# Altium PCB NerveSensePCBv0.2.PcbDoc
Units mil, origin at the board's own origin, x right, y up, seen from the top; angles counter-clockwise.
Board outline 1015 x 790 mil, 2 copper layers (Top Layer, Bottom Layer); 8 components, 9 nets, 28 pads, 6 vias.
Unrouted connection lines stored in the file: 1.
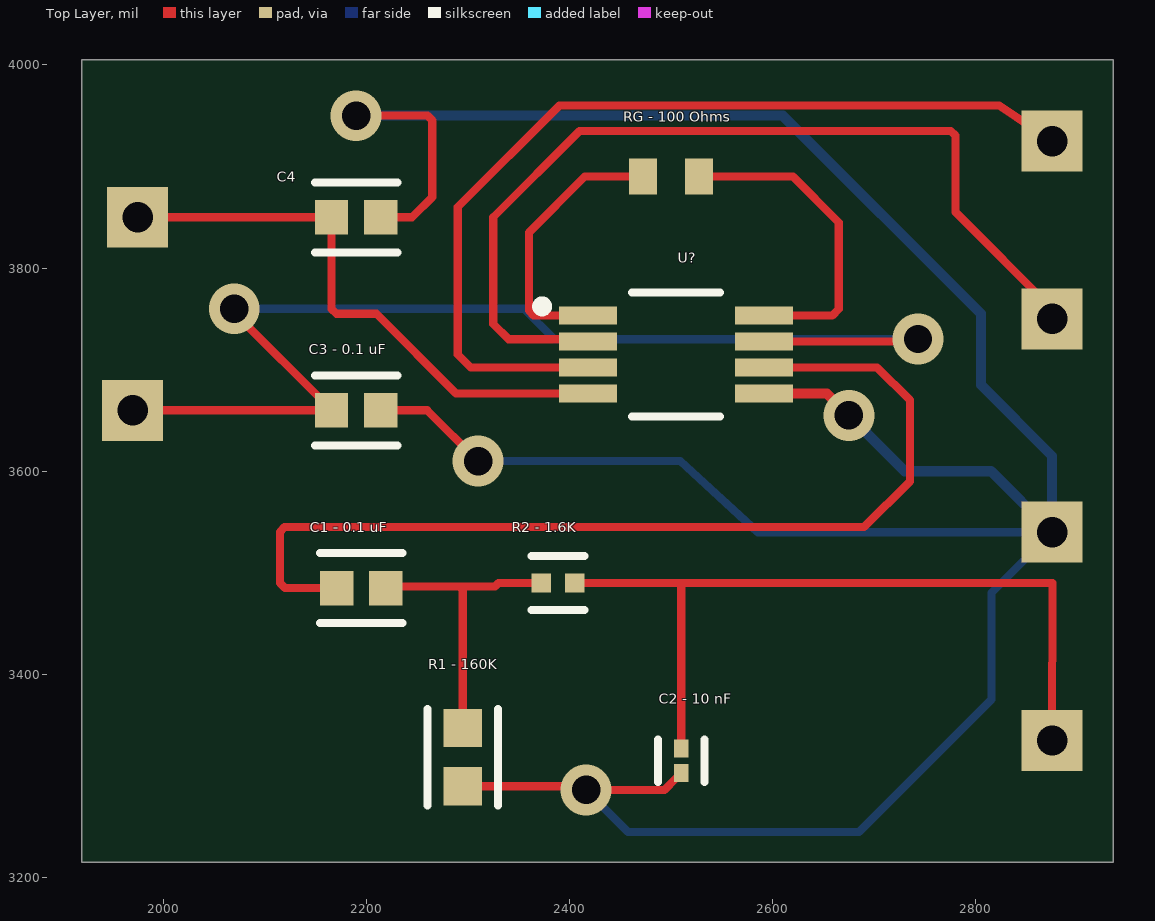
[diagram p0: Top Layer view]
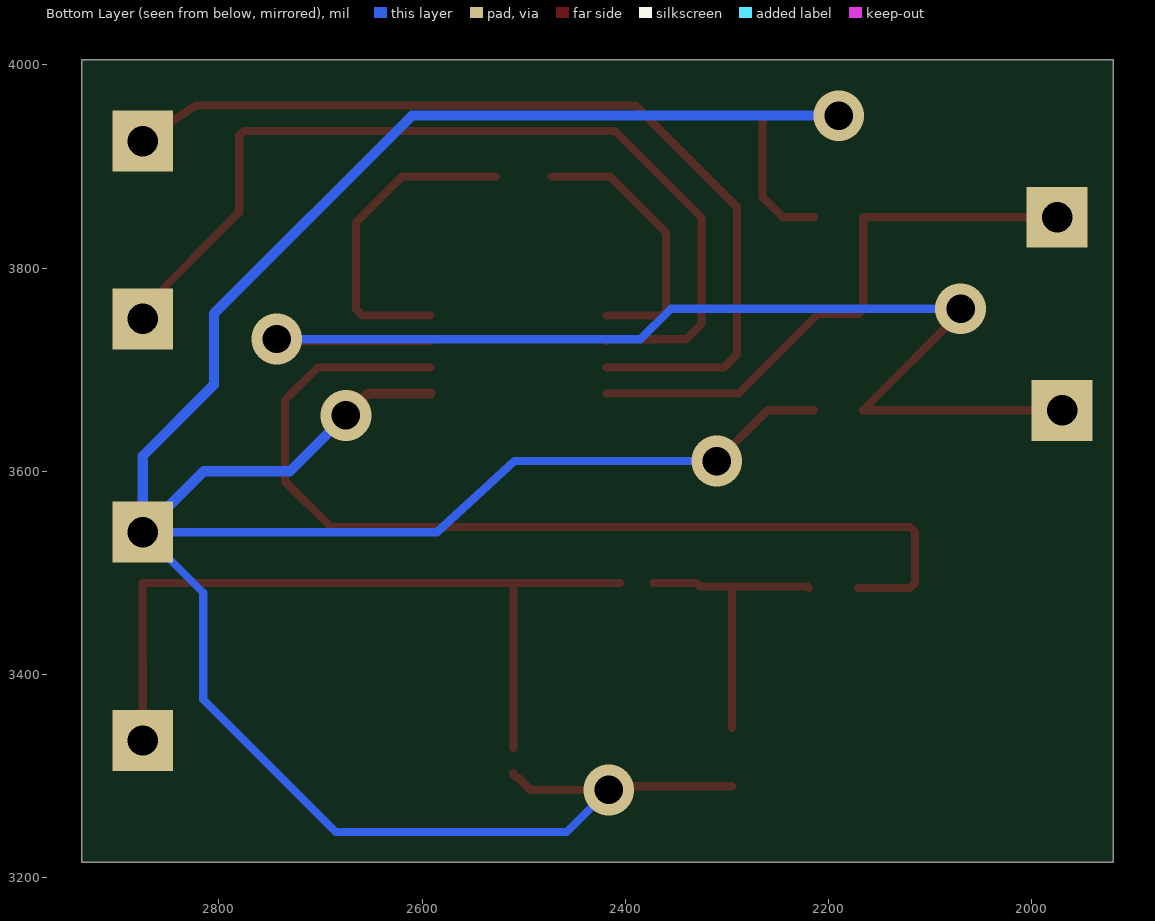
[diagram p1: Bottom Layer view, seen from below]
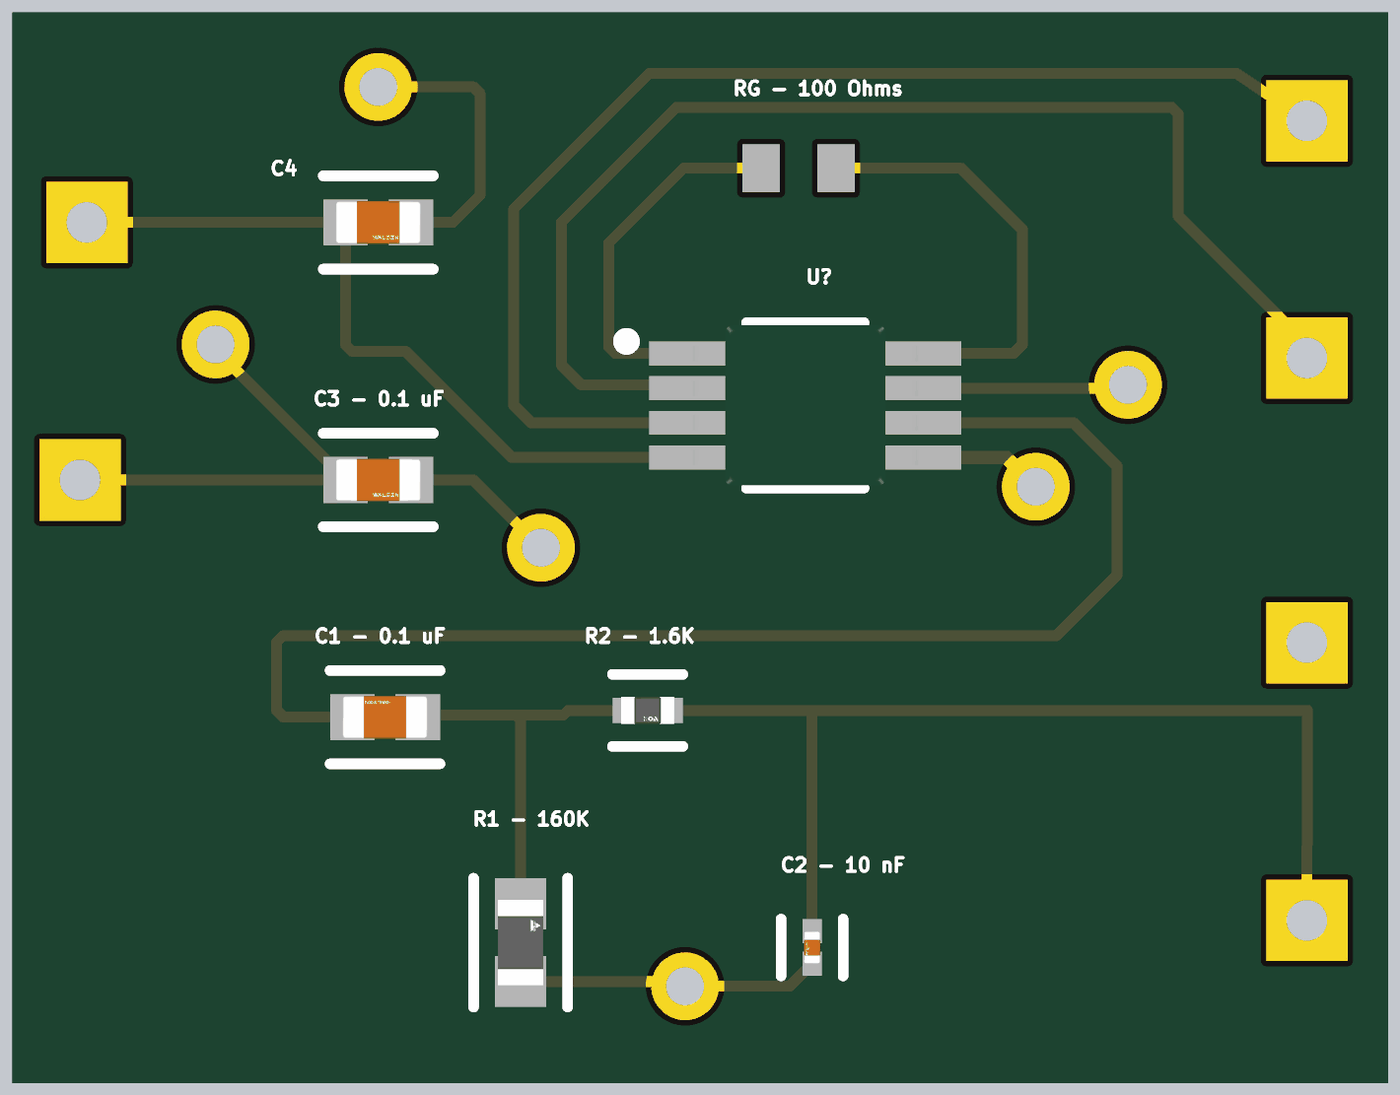
[diagram p2: 3D render of the assembled board from above, using the file's embedded part models]

## Layer stack, top to bottom
Top Solder: solder mask 0.4, Solder Resist, Dk 3.5
Top Layer: signal copper 1.4
Dielectric 1: dielectric 12.6, FR-4, Dk 4.8
Bottom Layer: signal copper 1.4
Bottom Solder: solder mask 0.4, Solder Resist, Dk 3.5

## Board outline
1920,3215 2935,3215 2935,4005 1920,4005

## Design rules (kind name [scope] priority, off if disabled: settings)
Clearance [All] p1: gap=10 ignorepadtopadclearanceinfootprint=FALSE
PolygonConnect [All] p1: connectstyle=Relief reliefconductorwidth=10 reliefentries=4 polygonreliefangle="90 Angle" airgapwidth=10
RoutingVias [All] p1: holewidth=28 width=50 viastyle="Through Hole" minholewidth=28 minwidth=50 maxholewidth=28 maxwidth=50
SolderMaskExpansion [All] p1: expansion=4 istentingtop=FALSE
SupplyNets "Schematic Supply Nets_2" [InNet('GND')] p1: voltage=0.000
SupplyNets "Schematic Supply Nets_1" [InNet('VSS')] p2: voltage=0.000
SupplyNets "Schematic Supply Nets" [InNet('VCC1')] p3: voltage=0.000
Width [All] p1: maxlimit=10 minlimit=8 preferedwidth=8 minimp=50.000000 maximp=50.000000 favimp=50.000000
30 further rules are at their usual default settings.

## Classes and differential pairs
component class NerveSenseCircuit: "C1 - 0.1 uF" "C2 - 10 nF" "C3 - 0.1 uF" C4 "R1 - 160K" "R2 - 1.6K" "RG - 100 Ohms"

## Components (designator, comment, footprint, x,y, rotation, side; value= is the part's Value field where it differs from the comment)
"C1 - 0.1 uF" "0603B104K500CT" FP-0603B104K500CT-IPC_C 2195,3485 r180 top
"C2 - 10 nF" "GRM033R60J103KA01J" FP-GRM033-0_03-IPC_B 2510,3315 r270 top
"C3 - 0.1 uF" "0603B104K500CT" FP-0603B104K500CT-IPC_C 2190,3660 r0 top
C4 "0603B104K500CT" FP-0603B104K500CT-IPC_C 2190,3850 r0 top
"R1 - 160K" "CRCW0603160KJNEAHP" FP-CRCW0603-HPe3-IPC_B 2295,3318.62 r90 top
"R2 - 1.6K" "RN73R1ETTP1601F25" FP-RN73R1E-IPC_C 2388.7,3490 r0 top
"RG - 100 Ohms" "RC0603JR-10100RL" RESC1608X55X25NL10T15 2500,3890 r180 top
U? "INA333AIDGKT" FP-DGK0008A-MFG 2505,3715 r0 top

## Footprints (in the part's own frame and the unit in brackets; to place one, negate y for a bottom-side part, rotate by r counter-clockwise, add the part's x,y. Pads: shape width x height; smd on the part's side, far side on the other; paste and mask are expansions set on the pad)
FP-0603B104K500CT-IPC_C [mil]
  rect 32.77x33.85 smd paste+0 mask+0: 1(-24.16,0) 2(24.16,0)
  silkscreen extent -41,-34 41,34, body extent -44,-23 44,23, height 10
FP-CRCW0603-HPe3-IPC_B [mil]
  rect 37.72x37.88 smd paste+0 mask+0: 1(-28.62,0) 2(28.62,0)
  silkscreen extent -47,-35 47,35, body extent -57,-29 57,29, height 10
FP-DGK0008A-MFG [mm]
  rect 1.45x0.45 smd paste+0 mask+0: 1(-2.2,0.975) 2(-2.2,0.325) 3(-2.2,-0.325) 4(-2.2,-0.975) 5(2.2,-0.975) 6(2.2,-0.325) 7(2.2,0.325) 8(2.2,0.975)
  silkscreen extent -3.47,-1.55 1.1,1.55, body extent -3.03,-1.8 3.03,1.8, height 0.25
FP-GRM033-0_03-IPC_B [mil]
  rect 17.88x14.28 smd paste+0 mask+0: 1(-11.98,0) 2(11.98,0)
  silkscreen extent -21,-23 21,23, body extent -27,-13 27,13, height 10
FP-RN73R1E-IPC_C [mil]
  rect 19.2x18.6 smd paste+0 mask+0: 1(-16.3,0) 2(16.3,0)
  silkscreen extent -26,-27 26,27, body extent -30,-15 30,15, height 10
RESC1608X55X25NL10T15 [mm] "Chip Resistor, 2-Leads, Body 1.60x0.80mm, IPC Medium Density"
  rect 0.7x0.9 smd: 1(-0.7,0) 2(0.7,0)
  body extent -0.85,-0.45 0.85,0.45, height 0.55

## Part data
"C1 - 0.1 uF" "C3 - 0.1 uF" C4: library part CMP-45632-000007-1, "CAP CER 0.1UF 50V X7R 0603", Capacitance=100nF, Case Code (Imperial)=0603, Case Code (Metric)=1608, Dielectric=X7R, Max Operating Temperature=125°C, Min Operating Temperature=-55°C, Tolerance=10%, Voltage Rating=50V, Case/Package=0603, Depth=0.8mm, Lead Free="Lead Free", Length=1.6mm, Packaging="Tape and Reel", Radiation Hardening=No, RoHS Compliant=Yes, Series=-, Voltage Rating (DC)=50V
"C2 - 10 nF": library part CMP-06035-052966-1, "Chip Multilayer Ceramic Capacitors for General Purpose, 0201, 10000pF, X5R, 15%, 10%, 6.3V"
"R1 - 160K": library part CMP-02407-008081-1, "RES Thick Film, 160kΩ, 5%, 0.33W, 200ppm/°C, 0603", Case/Package=0603, Max Operating Temperature=155°C, Max Power Dissipation=250mW, Min Operating Temperature=-55°C, Package Quantity=5000, Resistance=160kR, Temperature Coefficient=200ppm/°C, Tolerance=5%, Composition="Thick Film", Features="Automotive AEC-Q200", Height=0.022inch, Lead Free="Lead Free", Length=0.063inch, Number of Terminations=2, Packaging="Tape and Reel", Width=0.033inch
"R2 - 1.6K": library part CMP-04015-017185-1, "1.6kΩ ±1% 0.063W, 1/16W Chip Resistor 0402 (1005 Metric) Moisture Resistant Thin Film"
"RG - 100 Ohms": library part CMP-2000-04302-1, Manufacturer=Yageo, Part Number=RC0603JR-10100RL
U?: library part CMP-0944-00090-3, "IC INST AMP 1 CIRCUIT 8VSSOP", Ambient Temperature Range High=+125°C, Ambient Temperature Range Low=-40°C, Input Bias Current=0.00007uA, Input Offset Voltage=0.010-0.025mV, Manufacturer="Texas Instruments", Max Dual Supply Voltage=2.75V, Max Junction Temp=+150°C, Max Supply Voltage=5.5V, Min Dual Supply Voltage=0.9V, Min Supply Voltage=1.8V, Nominal Supply Current=50uA, Package=DGK0008A, Temperature="-40°C to +125°C", Voltage Gain=0.001-1V/mV, Automotive=No, Bandwidth=150kHz, Category=IC, Ciiva Ids=1154636, ComponentLink2Description=Datasheet, ComponentLink2URL=http://www.ti.com/lit/ds/symlink/ina333.pdf, Device Class L1="Integrated Circuits (ICs)", Device Class L2="Linear ICs", Device Class L3=Instrumentation, Digikey Description="IC INST AMP 1 CIRCUIT 8VSSOP", Height=1.1mm, Import Ts=1521844208, Lead Free=Yes, Manufacturer Part Number=INA333AIDGKT, Mouser Description="Instrumentation Amplifiers Lo Pwr Prec Inst Amp", Number Of Channels=1, Octopart=https://octopart.com/ina333aidgkt-texas+instruments-8315938, Release Date=1464176905, RoHS=TRUE, Standoff Height=0.05mm, Temperature Range High=+125°C, Temperature Range Low=-40°C

## Free pads (board coordinates)
  rect 60x60 hole 30: "Ground Electrode"(2875,3540) "Negative Electrode"(2875,3750) "Sensor Electrode"(2875,3925) Vout(2875,3335) ""(1970,3660) ""(1975,3850)

## Via types
v1: diameter 50, hole 28, Top Layer to Bottom Layer, 6 vias

## Nets (pads, with @x,y where several pads share a name; then routed paths per layer and width w, separated by ;. In a path a pad name is that pad's centre, name@x,y a point inside that pad or via, vN(x,y) a via of type N, cw(c..) or ccw(c..) an arc to the next point about the centre after c; other vN are vias at no path point)
GND: "C2 - 10 nF.2" "C3 - 0.1 uF.2" "pad.Ground Electrode" "R1 - 160K.1" C4.2 U?.5 | length 3083.9
  Top Layer w8: v1(2190,3950) 2260.31,3950 2265,3945.31 2265,3870 2245,3850 C4.2 ; 2214.16,3660 2260,3660 v1(2310,3610) ; 2295,3290 2412.72,3290 v1(2416.3,3286.42) 2493.4,3286.42 2505.06,3298.08 2506.86,3298.08 2510,3301.22 2510,3303.02
  Top Layer w10: U?.5 2653.39,3676.61 v1(2675,3655)
  Bottom Layer w8: v1(2310,3610) 2509.06,3610 2585.46,3540 2875,3540 2815.42,3480.42 2815.42,3375.42 2685,3245 2457.72,3245 v1(2416.3,3286.42)
  Bottom Layer w10: v1(2190,3950) 2610,3950 2805,3755 2805,3685 2875,3615 2875,3540 2815,3600 2730,3600 v1(2675,3655)
"NetC1 - 0.1 uF_1": "C1 - 0.1 uF.1" "C1 - 0.1 uF.2" "R1 - 160K.2" "R2 - 1.6K.1" U?.6 | length 1281.6
  Top Layer w8: 2170.84,3485 2120,3485 2115,3490 2115,3540.31 2119.69,3545 2690,3545 2735,3590 2735,3670 2702.8,3702.2 U?.6 ; 2219.16,3485 2220.77,3486.61 2291.66,3486.61 ; 2295,3347.24 2295,3483.27 2291.66,3486.61 ; 2372.39,3490 2330,3490 2326.61,3486.61 2291.66,3486.61
"NetC2 - 10 nF_1": "C2 - 10 nF.1" "R2 - 1.6K.2" pad.Vout | length 788.3
  Top Layer w8: 2405,3490 2510,3490 ; 2510,3326.98 2510,3490 ; pad.Vout 2875.32,3490 2510,3490
"NetRG - 100 Ohms_1": "RG - 100 Ohms.1" U?.8 | length 317.4
  Top Layer w8: 2527.56,3890 2620,3890 2665,3845 2665,3759.69 2658.7,3753.39 U?.8
"NetRG - 100 Ohms_2": "RG - 100 Ohms.2" U?.1 | length 272.5
  Top Layer w8: U?.1 2364.69,3753.39 2360,3758.07 2360,3835 2415,3890 2472.44,3890
NetU?_2: "pad.Negative Electrode" U?.2 | length 917.3
  Top Layer w8: U?.2 2416.18,3730 2340,3730 2325,3745 2325,3850 2410,3935 2775.31,3935 2780,3930.31 2780,3855 2875,3760 2875,3750
NetU?_3: "pad.Sensor Electrode" U?.3 | length 915.8
  Top Layer w8: U?.3 2302.8,3702.2 2290,3715 2290,3860 2390,3960 2823.05,3960 2875,3925
VCC1: "C3 - 0.1 uF.1" pad.@1970,3660 U?.7 | length 1173.4
  Top Layer w8: pad.@1970,3660 2165.84,3660 2165.84,3660.54 2070,3756.38 v1(2070,3760) ; U?.7 2740.63,3727.8 v1(2743.02,3730.19)
  Bottom Layer w8: v1(2070,3760) 2355,3760 2385,3730 v1@2743.02,3730
VSS: C4.1 pad.@1975,3850 U?.4 | length 568.1
  Top Layer w8: pad.@1975,3850 C4.1 2165.84,3759.69 2170.53,3755 2210,3755 2288.39,3676.61 U?.4